# EAGLE board atmegaboard version 1 (EAGLE 9.4.0)
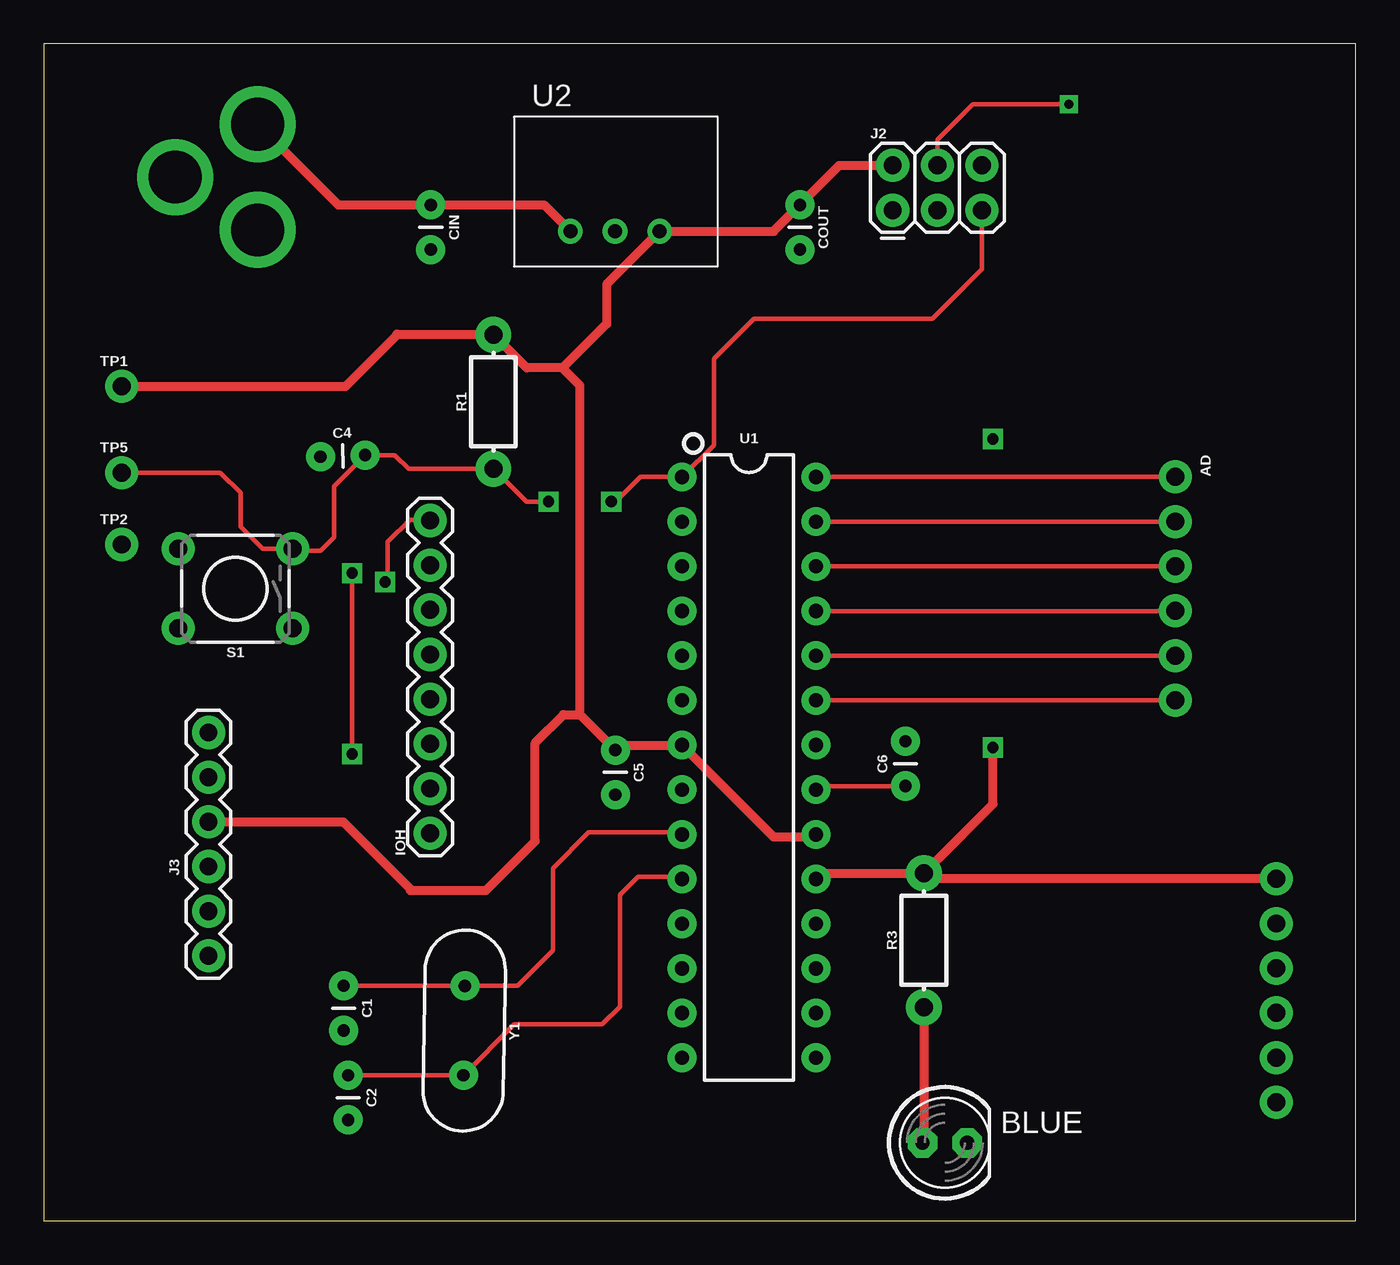
[diagram p0: board, top side]
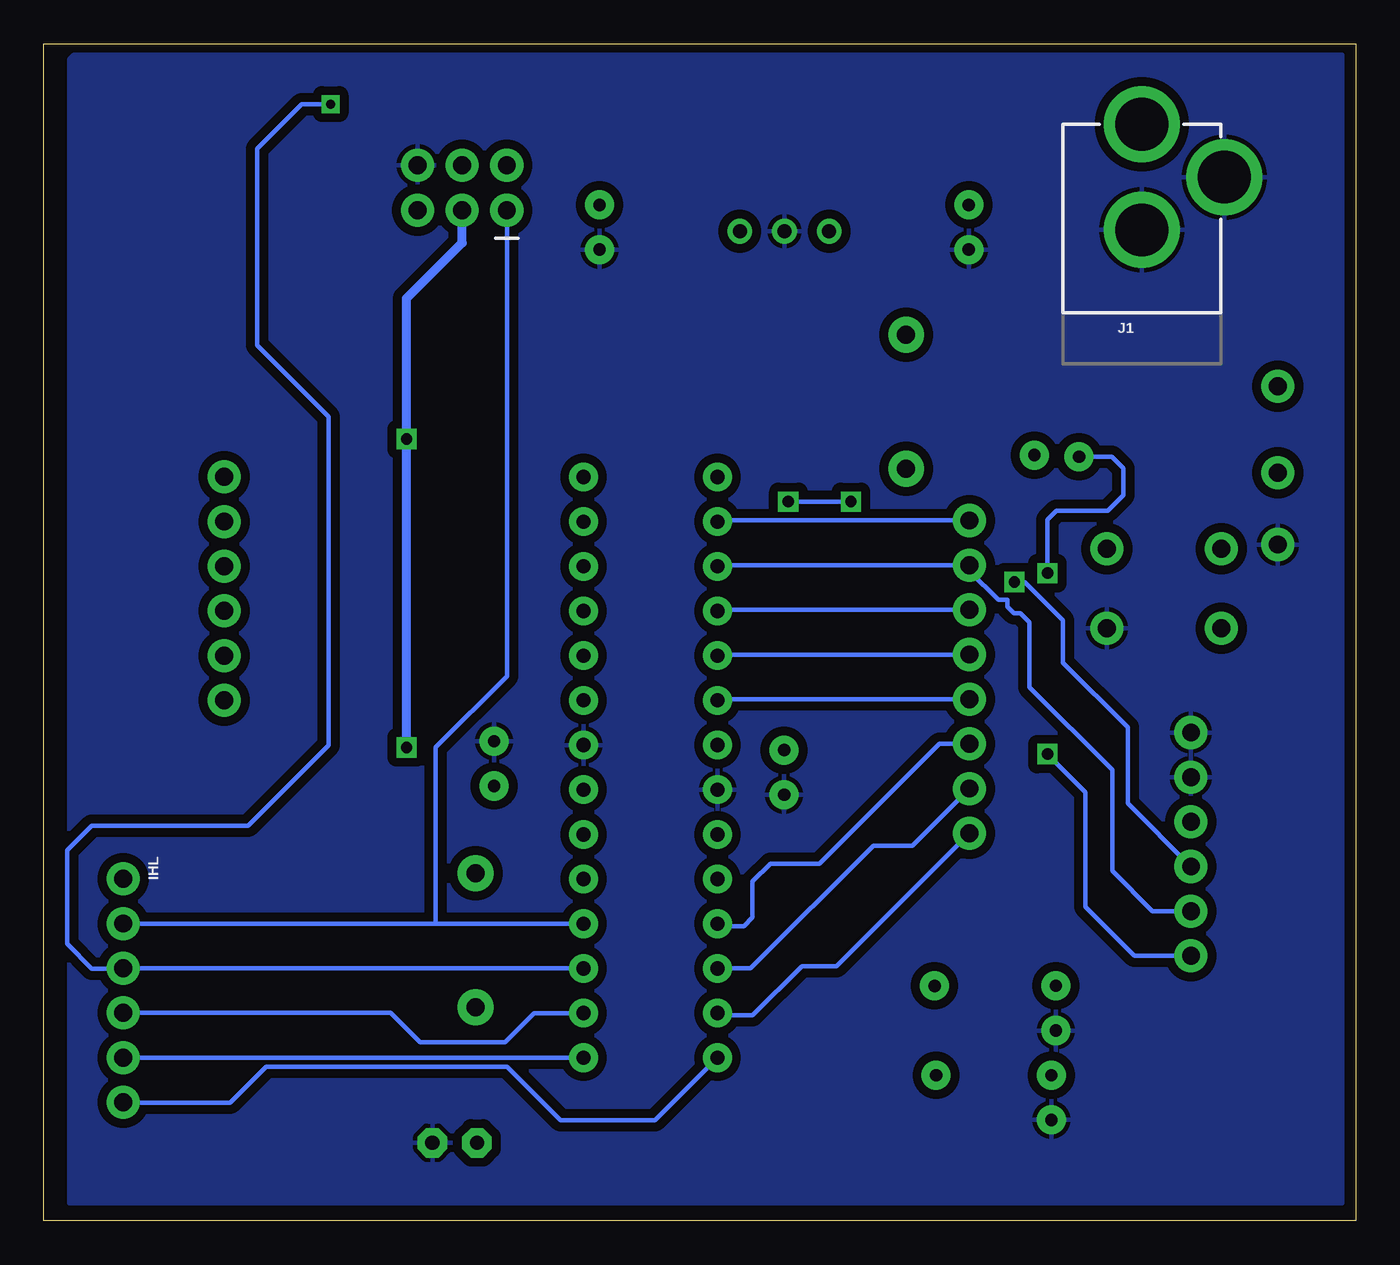
[diagram p1: board, bottom side, seen from below]

Size 74.6 x 66.92 mm. Coordinates in mm from the lower left corner, seen from the top.
Outline: 0,0 74.6,0 74.6,66.92 0,66.92 0,0
Copper layers (1*16): Top 0.035mm / dielectric 1.5mm / Bottom 0.035mm
Design rules "SparkFun": minimum track width 8mil, minimum drill 20mil, track to track 8mil, track to pad 8mil, pad to pad 8mil, via to via 8mil, smd to smd 8mil, copper to edge 10mil, drill to drill 8mil, minimum pad ring 12mil, minimum via ring 10mil, stop-mask expansion 4mil, vias tented up to drill 25mil, thermal gap 10mil
Net classes: 0 default: width 0.254 mm, clearance 0.254 mm; 1 supply: width 0.508 mm, clearance 0.508 mm

## Footprints (pad centres in the part's own frame; a part is rotated, then mirrored left to right if it is on the bottom)
1X06_NO_SILK = drill 1.016 pad 1.88: 1 0,0; 2 2.54,0; 3 5.08,0; 4 7.62,0; 5 10.16,0; 6 12.7,0
LED5MM = drill 0.813 pad 1.676 octagon: A -1.27,0; K 1.27,0
CAP-PTH-2.54 = drill 0.7 pad 1.651: 1 -1.27,0; 2 1.27,0
1X08 = drill 1.016 pad 1.88: 1 0,0; 2 2.54,0; 3 5.08,0; 4 7.62,0; 5 10.16,0; 6 12.7,0; 7 15.24,0; 8 17.78,0
POWER_JACK_PTH = drill 2.997 pad 4.318: GND 0,7.7; GNDBREAK 4.7,10.7; PWR 0,13.7
2X3 = drill 1.016 pad 1.88: 1 0,0; 2 0,2.54; 3 2.54,0; 4 2.54,2.54; 5 5.08,0; 6 5.08,2.54
FTDI_BASIC = drill 1.016 pad 1.88: CTS 10.16,0; DTR 0,0; GND 12.7,0; RXI 2.54,0; TXO 5.08,0; VCC 7.62,0
AXIAL-0.3-KIT = drill 1.016 pad 2.032: P$1 -3.81,0; P$2 3.81,0
TACTILE_SWITCH_PTH_6.0MM = drill 1.016 pad 1.88: 1 -3.251,2.261; 2 3.251,2.261; 3 -3.251,-2.261; 4 3.251,-2.261
1X01_NO_SILK = drill 1.016 pad 1.88: 1 0,0
DIP28 = drill 0.813 pad 1.626: 1 -16.51,-3.81; 2 -13.97,-3.81; 3 -11.43,-3.81; 4 -8.89,-3.81; 5 -6.35,-3.81; 6 -3.81,-3.81; 7 -1.27,-3.81; 8 1.27,-3.81; 9 3.81,-3.81; 10 6.35,-3.81; 11 8.89,-3.81; 12 11.43,-3.81; 13 13.97,-3.81; 14 16.51,-3.81; 15 16.51,3.81; 16 13.97,3.81; 17 11.43,3.81; 18 8.89,3.81; 19 6.35,3.81; 20 3.81,3.81; 21 1.27,3.81; 22 -1.27,3.81; 23 -3.81,3.81; 24 -6.35,3.81; 25 -8.89,3.81; 26 -11.43,3.81; 27 -13.97,3.81; 28 -16.51,3.81
DC-DC_CONVERTER_78XX = drill 0.8: GND 0,0; VIN -2.54,0; VOUT 2.54,0
HC49US = drill 0.7 pad 1.651: 1 -2.54,0; 2 2.54,0

## Placement (x,y rotation side)
AD  J1  [1X06_NO_SILK]  64.36,42.31 270 top
BLUE  LED  [LED5MM]  51.24,4.44 0 top
C1  22pF  [CAP-PTH-2.54]  17.04,12.1 270 top
C2  22pF  [CAP-PTH-2.54]  17.3,7.02 270 top
C4  0.1uF  [CAP-PTH-2.54]  17,43.5 2 top
C5  0.1uF  [CAP-PTH-2.54]  32.5,25.5 270 top
C6  0.1uF  [CAP-PTH-2.54]  49,26 90 top
CIN  0.33pF  [CAP-PTH-2.54]  22,56.5 270 top
COUT  0.1uF  [CAP-PTH-2.54]  43,56.5 270 top
IHL  J3  [1X06_NO_SILK]  70.09,19.45 270 bottom
IOH  J2  [1X08]  21.97,22.05 90 top
J1  POWER_JACK  [POWER_JACK_PTH]  12.16,48.65 0 bottom
J2  ISP  [2X3]  48.27,57.47 0 top
J3  UART  [FTDI_BASIC]  9.36,15.07 90 top
R1  10k  [AXIAL-0.3-KIT]  25.57,46.58 90 top
R3  1k  [AXIAL-0.3-KIT]  50.05,15.96 90 top
S1  RST  [TACTILE_SWITCH_PTH_6.0MM]  10.89,35.95 180 top
TP1  5V  [1X01_NO_SILK]  4.43,47.45 0 top
TP2  GND  [1X01_NO_SILK]  4.43,38.46 0 top
TP5  RST  [1X01_NO_SILK]  4.43,42.54 0 top
U1  328P  [DIP28]  40.1,25.79 270 top
U2  R-78E5.0-1.0  [DC-DC_CONVERTER_78XX]  32.48,56.27 0 top
Y1  16MHz  [HC49US]  23.9,10.83 269 top

## Library data of the parts
AD IHL = SparkFun-Connectors; PROD_ID: CONN-08437
BLUE = adafruit
C1 C2 C4-C6 CIN COUT = SparkFun-Capacitors; PROD_ID: CAP-09128
IOH = SparkFun-Connectors; PROD_ID: CONN-08438
J1 = SparkFun-Connectors; PROD_ID: CONN-08197
J2 J3 TP1 TP2 TP5 = SparkFun-Connectors
R1 R3 = SparkFun-Resistors; PROD_ID: RES-09435
S1 = SparkFun-Switches; PROD_ID: SWCH-08441; SF_SKU: COM-00097
U1 = SparkFun-IC-Microcontroller; PROD_ID: IC-09136
U2 = SparkFun-IC-Power; PROD_ID: COM-13655
Y1 = SparkFun-Clocks; PROD_ID: XTAL-08181; SF_ID: COM-00536

## Nets
AD0: AD.6 U1.23
AD1: AD.5 U1.24
AD2: AD.4 U1.25
AD3: AD.3 U1.26
AD4: AD.2 U1.27
AD5: AD.1 U1.28
AREF: C6.1 U1.21
DTR: C4.1 J3.DTR
GND [supply]: BLUE.K C1.2 C2.2 C5.2 C6.2 CIN.2 COUT.2 J1.GND J1.GNDBREAK J2.6 J3.CTS J3.GND S1.1 TP2.1 U1.8 U1.22 U2.GND
I08: IHL.6 U1.14
I09: IHL.5 U1.15
IO2: IOH.6 U1.4
IO3: IOH.5 U1.5
IO4: IOH.4 U1.6
IO5: IOH.3 U1.11
IO6: IOH.2 U1.12
IO7: IOH.1 U1.13
LED: BLUE.A R3.P$1
MISO: IHL.2 J2.1 U1.18
MOSI: IHL.3 J2.4 U1.17
RST: C4.2 J2.5 R1.P$1 S1.3 TP5.1 U1.1
RXD: IOH.8 J3.TXO U1.2
SCK [supply]: IHL.1 J2.3 R3.P$2 U1.19
SS: IHL.4 U1.16
TXD: IOH.7 J3.RXI U1.3
VCC [supply]: C5.1 COUT.1 J2.2 J3.VCC R1.P$2 TP1.1 U1.7 U1.20 U2.VOUT
VIN [supply]: CIN.1 J1.PWR U2.VIN
XTAL1: C1.1 U1.9 Y1.1
XTAL2: C2.1 U1.10 Y1.2

## Tracks (layer width: path | path; a pad name or v marks a point on that pad's centre or on a via)
AD0
  Top 0.254: U1.23 AD.6
AD1
  Top 0.254: AD.5 U1.24
AD2
  Top 0.254: AD.4 U1.25
AD3
  Top 0.254: AD.3 U1.26
AD4
  Top 0.254: AD.2 U1.27
AD5
  Top 0.254: AD.1 U1.28
AREF
  Top 0.254: U1.21 44.12,24.73 C6.1
DTR  (via drill 0.65)
  Top 0.254: v17.53,26.54 v17.53,36.83
  Bottom 0.254: J3.DTR 12.57,15.07 15.37,17.87 15.37,24.38 v17.53,26.54 | v17.53,36.83 17.53,39.88 17.02,40.39 14.1,40.39 13.21,41.27 13.21,42.8 13.87,43.46 C4.1
GND
  pour Bottom (isolate 0.406): 1.27,66.29 72.9,66.29 73.15,66.04 73.15,4.06 73.15,1.02 0.76,1.02 0.76,66.29
I08
  Bottom 0.254: U1.14 39.85,5.71 45.21,5.71 48.27,8.77 61.97,8.77 64.01,6.73 70.08,6.73 IHL.6
I09
  Bottom 0.254: U1.15 IHL.5
IO2
  Bottom 0.254: IOH.6 36.22,34.75 U1.4
IO3
  Bottom 0.254: IOH.5 36.22,32.21 U1.5
IO4
  Bottom 0.254: IOH.4 36.22,29.67 U1.6
IO5
  Bottom 0.254: IOH.3 23.67,27.13 30.48,20.32 33.27,20.32 34.29,19.3 34.29,17.27 34.8,16.76 36.15,16.76 U1.11
IO6
  Bottom 0.254: IOH.2 25.22,21.34 27.43,21.34 34.41,14.36 U1.12
IO7
  Bottom 0.254: IOH.1 29.53,14.48 31.5,14.48 34.29,11.68 36.15,11.68 U1.13
LED
  Top 0.508: R3.P$1 50.05,4.53 BLUE.A
MISO
  Bottom 0.254: U1.18 52.32,16.91 | 52.32,16.91 IHL.2 | J2.1 48.27,30.98 52.32,26.92 52.32,16.91
MOSI  (via drill 0.51)
  Top 0.254: v58.29,63.5 52.83,63.5 50.81,61.48 J2.4
  Bottom 0.254: U1.17 IHL.3 70.11,14.35 71.88,14.35 73.28,15.75 73.28,21.08 71.88,22.48 62.99,22.48 58.42,27.05 58.42,45.72 62.48,49.78 62.48,60.96 59.94,63.5 v58.29,63.5
RST  (via drill 0.65)
  Top 0.254: v32.26,40.89 32.51,40.89 33.92,42.3 U1.1 38.1,44.11 38.1,49.02 40.39,51.31 50.55,51.31 53.35,54.11 J2.5 | v28.7,40.89 27.44,40.89 R1.P$1 20.73,42.77 19.96,43.54 C4.2 16.51,41.78 16.51,38.86 15.75,38.1 14.25,38.1 S1.3 12.45,38.21 11.18,39.48 11.18,41.4 10.03,42.55 TP5.1
  Bottom 0.254: v32.26,40.89 v28.7,40.89
RXD  (via drill 0.65)
  Top 0.254: v19.4,36.32 19.56,36.47 19.56,38.61 20.83,39.88 21.91,39.88 IOH.8
  Bottom 0.254: IOH.8 36.22,39.83 U1.2 | J3.TXO 12.95,23.75 12.95,28.07 16.64,31.75 16.64,34.16 18.79,36.32 v19.4,36.32
SCK  (via drill 0.65)
  Top 0.508: R3.P$2 44.24,19.77 U1.19 | IHL.1 50.37,19.45 R3.P$2 | R3.P$2 53.98,23.7 v53.98,26.92
  Bottom 0.508: v53.98,26.92 v53.98,44.45 53.98,52.45 50.81,55.61 J2.3
SS
  Bottom 0.254: IHL.4 54.88,11.83 53.21,10.16 48.39,10.16 46.73,11.82 U1.16
TXD
  Bottom 0.254: U1.3 36.22,37.29 IOH.7 21.97,36.95 20.32,35.31 19.81,35.31 19.81,34.92 19.43,34.54 19.05,34.54 18.54,34.04 18.54,30.35 13.84,25.65 13.84,19.9 11.56,17.61 J3.RXI
VCC
  Top 0.508: J2.2 45.24,60.01 COUT.1 41.5,56.27 U2.VOUT 32,53.25 32,51 29.5,48.5 29.48,48.5 | 29.48,48.5 27.45,48.5 R1.P$2 25.54,50.42 20.07,50.42 20.07,50.37 17.14,47.45 TP1.1 | 30.48,28.79 C5.1 32.79,27.06 U1.7 41.51,21.84 43.77,21.84 U1.20 | 29.48,48.5 30.48,47.5 30.48,28.79 | J3.VCC 17.02,22.69 20.83,18.88 20.83,18.8 25.15,18.8 27.94,21.59 27.94,27.18 29.55,28.79 30.48,28.79
VIN
  Top 0.508: J1.PWR 16.74,57.77 CIN.1 28.44,57.77 U2.VIN
XTAL1
  Top 0.254: C1.1 Y1.1 26.92,13.37 28.96,15.4 28.96,20.07 30.99,22.1 36.17,22.1 U1.9 | C1.1
XTAL2
  Top 0.254: U1.10 36.17,19.56 33.78,19.56 32.77,18.54 32.77,12.19 31.75,11.18 26.74,11.18 Y1.2 C2.1